# EAGLE board krajBB-Mojžiš_Matej8 (EAGLE 7.7.0)
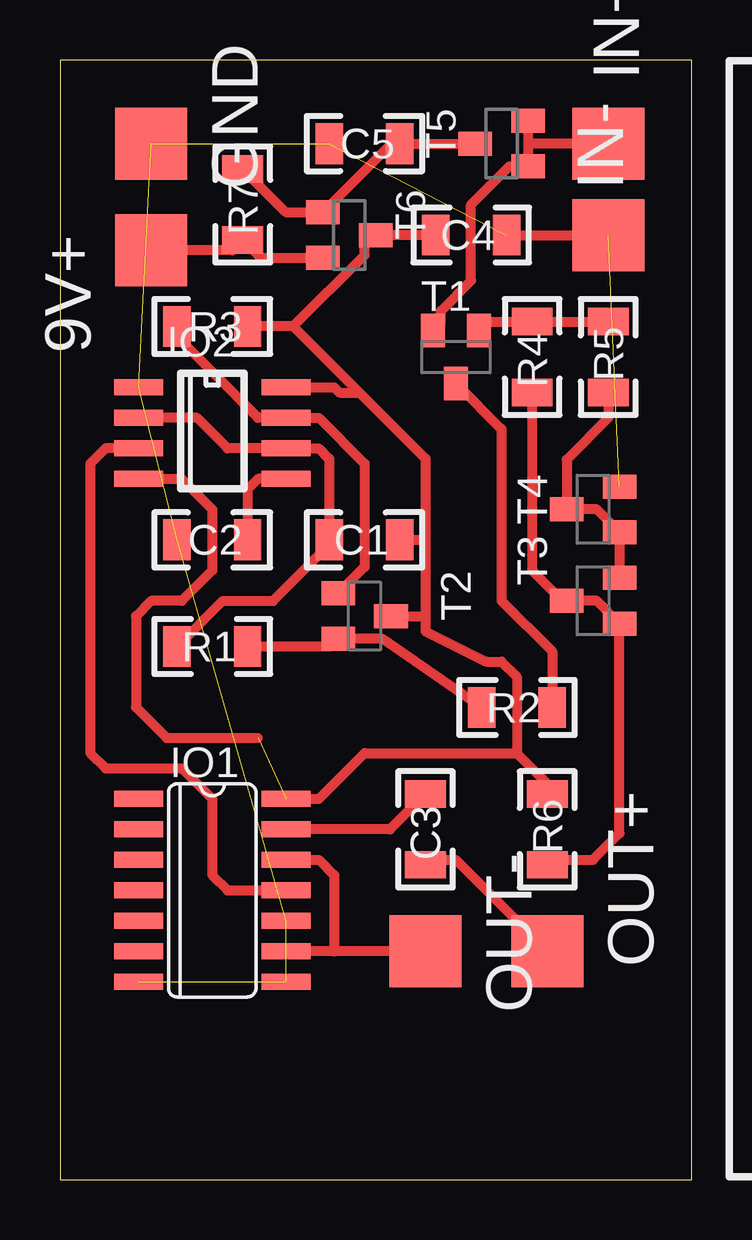
[diagram p0: board, top side]

Size 26.34 x 46.66 mm. Coordinates in mm from the lower left corner, seen from the top.
Outline: 0,0 26.34,0 26.34,46.66 0,46.66 0,0
Copper layers (1*16): Top 0.035mm / dielectric 1.5mm / Bottom 0.035mm
Design rules "default *": minimum track width 10mil, minimum drill 24mil, track to track 8mil, track to pad 8mil, pad to pad 8mil, via to via 8mil, smd to smd 8mil, copper to edge 16mil, drill to drill 8mil, minimum pad ring 10mil, minimum via ring 8mil, stop-mask expansion 4mil, vias tented up to drill 0mil, thermal gap 10mil

## Footprints (pad centres in the part's own frame; a part is rotated, then mirrored left to right if it is on the bottom)
SMD3X3 = smd 3 x 3: P$1 0,0
1206 = smd 1.143 x 1.702: 1 -1.473,0; 2 1.473,0
SO14 = smd 0.66 x 2.032: 1 -3.81,-3.073; 2 -2.54,-3.073; 3 -1.27,-3.073; 4 0,-3.073; 5 1.27,-3.073; 6 2.54,-3.073; 7 3.81,-3.073; 8 3.81,3.073; 9 2.54,3.073; 10 1.27,3.073; 11 0,3.073; 12 -1.27,3.073; 13 -2.54,3.073; 14 -3.81,3.073
SO08 = smd 0.66 x 2.032: 1 -1.905,-3.073; 2 -0.635,-3.073; 3 0.635,-3.073; 4 1.905,-3.073; 5 1.905,3.073; 6 0.635,3.073; 7 -0.635,3.073; 8 -1.905,3.073
LD-DR-3519 = drill 1 pad 1.93 long: P$1 -3,-15; P$2 3,-15
SOT23-BEC = smd 1 x 1.4: B -0.95,-1.1; C 0,1.1; E 0.95,-1.1
SOT23 = smd 1 x 1.4: 1 -0.95,-1.1; 2 0.95,-1.1; 3 0,1.1

## Placement (x,y rotation side)
9V+  SMD3X3  [SMD3X3]  3.81,38.73 270 top
C1  1u  [1206]  12.7,26.67 0 top
C2  1u  [1206]  6.35,26.67 0 top
C3  1u  [1206]  15.24,14.61 270 top
C4  1u  [1206]  17.14,39.37 180 top
C5  1u  [1206]  12.7,43.18 0 top
GND  SMD3X3  [SMD3X3]  3.81,43.18 90 top
IN+  SMD3X3  [SMD3X3]  22.86,43.18 270 top
IN-  SMD3X3  [SMD3X3]  22.86,39.37 90 top
IO1  4013D  [SO14]  6.35,12.06 270 top
IO2  NE555D  [SO08]  6.35,31.11 270 top
OUT+  SMD3X3  [SMD3X3]  20.32,9.53 90 top
OUT-  SMD3X3  [SMD3X3]  15.24,9.53 90 top
R1  100  [1206]  6.35,22.23 180 top
R2  470  [1206]  19.05,19.68 180 top
R3  10k  [1206]  6.35,35.56 0 top
R4  10k  [1206]  19.68,34.29 270 top
R5  2.2k  [1206]  22.86,34.29 90 top
R6  47k  [1206]  20.32,14.61 90 top
R7  10M  [1206]  7.62,40.64 270 top
REPRODUKTOR  LD-DR-3519  [LD-DR-3519]  73.03,23.5 0 top  (outside the outline)
T1  BC817-25  [SOT23-BEC]  16.51,34.29 180 top
T2  BC817-25  [SOT23-BEC]  12.7,23.5 270 top
T3  BC817-25  [SOT23-BEC]  22.23,24.13 90 top
T4  BC817-25  [SOT23-BEC]  22.23,27.94 90 top
T5  BSS84  [SOT23]  18.41,43.18 90 top
T6  BSS84  [SOT23]  12.06,39.37 270 top
U$1  9VBATTERY  [9VBATTERY]  41.91,24.13 0 top  (outside the outline)

## Library data of the parts
9V+ GND IN+ IN- OUT+ OUT- = solpad
C1-C5 R1-R7 = rcl
IO1 = 40xx
IO2 = linear
REPRODUKTOR = buzzer
T1-T4 = transistor-npn
T5 T6 = transistor-small-signal
U$1 = battery

## Nets
9V_1: R4.2 R6.1 T3.B T3.C
9V_2: R5.1 T3.E T4.B T4.C
+9V: C1.2 C4.2 IO1.14 IO2.4 IO2.8 R3.2 R6.2 T2.C T6.3
CLOCK: IO1.11 IO2.3
CV: C2.2 IO2.5
DIS: IO2.7 R3.1 T2.B
DIS_1: R2.1 T1.C
DIS_IN: R1.1 R2.2 T2.E
DIV: R4.1 R5.2 T1.B
GND: C2.1 C4.1 C5.1 GND.P$1 IN-.P$1 IO1.7 IO1.8 IO1.10 IO2.1 T4.E
IN: IN+.P$1 T1.E T5.1 T5.2
MOS: C5.2 R7.1 T5.3 T6.1
OUT: C3.1 IO1.13
REP: C3.2 OUT+.P$1
REP+: IO1.9 IO1.12 OUT-.P$1
THR: C1.1 IO2.2 IO2.6 R1.2
VIN: 9V+.P$1 R7.2 T6.2

## Tracks (layer width: path | path; a pad name or v marks a point on that pad's centre or on a via)
9V_1
  Top 0.406: R4.2 19.68,25.4 20.95,24.13 T3.C 22.38,24.13 T3.B 23.32,14.44 22.23,13.34 20.52,13.34 R6.1
9V_2
  Top 0.406: T3.E T4.B 22.38,27.94 T4.C 21.12,30.02 22.86,31.75 R5.1
+9V  (1 unrouted)
  Top 0.406: C4.2 T6.3 12.7,38.91 12.7,38.53 9.73,35.56 | 15.24,26.67 15.24,30.05 12.48,32.8 | 15.24,26.67 15.24,23.5 | 15.24,23.5 15.24,22.86 17.78,21.59 18.41,21.59 19.05,20.95 19.05,17.78 | T2.C 15.24,23.5 | 19.05,17.78 20.32,16.51 R6.2 | IO1.14 10.79,15.88 12.7,17.78 19.05,17.78 | IO2.4 5.08,29.21 6.35,27.94 6.35,25.4 5.08,24.13 3.81,24.13 3.17,23.5 3.17,19.68 4.45,18.41 8.26,18.41 | C1.2 15.24,26.67 | 12.48,32.8 9.73,35.56 | 9.73,35.56 R3.2 | IO2.8 11.43,33.02 11.65,32.8 12.48,32.8
CLOCK
  Top 0.406: IO2.3 1.91,30.48 1.27,29.84 1.27,17.78 1.91,17.14 5.08,17.14 6.35,15.88 6.35,12.7 6.99,12.06 IO1.11
CV
  Top 0.406: IO2.5 8.26,29.21 7.82,28.78 C2.2
DIS
  Top 0.406: T2.B 12.7,25.55 12.7,29.84 10.79,31.75 IO2.7 8.26,31.75 4.88,35.13 R3.1
DIS_1
  Top 0.406: T1.C 18.41,31.29 18.41,24.13 20.52,22.02 R2.1
DIS_IN
  Top 0.406: R2.2 13.45,22.55 T2.E 11.28,22.23 R1.1
DIV
  Top 0.406: T1.B 17.83,35.76 R4.1 R5.2
GND  (8 unrouted)
  Top 0.406: C4.1 IN-.P$1
IN
  Top 0.406: T5.2 19.52,43.18 | 19.52,43.18 T5.1 18.73,42.23 17.14,40.64 17.14,37.47 15.88,36.2 15.88,35.7 T1.E | IN+.P$1 19.52,43.18
MOS
  Top 0.406: R7.1 9.41,40.32 T6.1 13.82,43.18 C5.2 T5.3
OUT
  Top 0.406: C3.1 13.77,14.61 IO1.13
REP
  Top 0.406: C3.2 15.44,13.34 16.51,13.34 OUT+.P$1
REP+
  Top 0.406: OUT-.P$1 11.43,9.53 | 11.43,9.53 IO1.9 | IO1.12 10.79,13.34 11.43,12.7 11.43,9.53
THR
  Top 0.406: IO2.2 5.71,31.75 6.99,30.48 IO2.6 10.79,30.48 11.23,30.05 C1.1 11.23,26.47 8.89,24.13 6.78,24.13 R1.2
VIN
  Top 0.406: 9V+.P$1 7.19,38.73 R7.2 8.37,38.42 T6.2